# Altium PCB MSXII_Controller_Breakout.PcbDoc
Units mm, origin at the board's own origin, x right, y up, seen from the top; angles counter-clockwise.
Board outline 50 x 50 mm, 2 copper layers (Top Layer, Bottom Layer); 4 components, 32 nets, 556 pads, 21 vias.
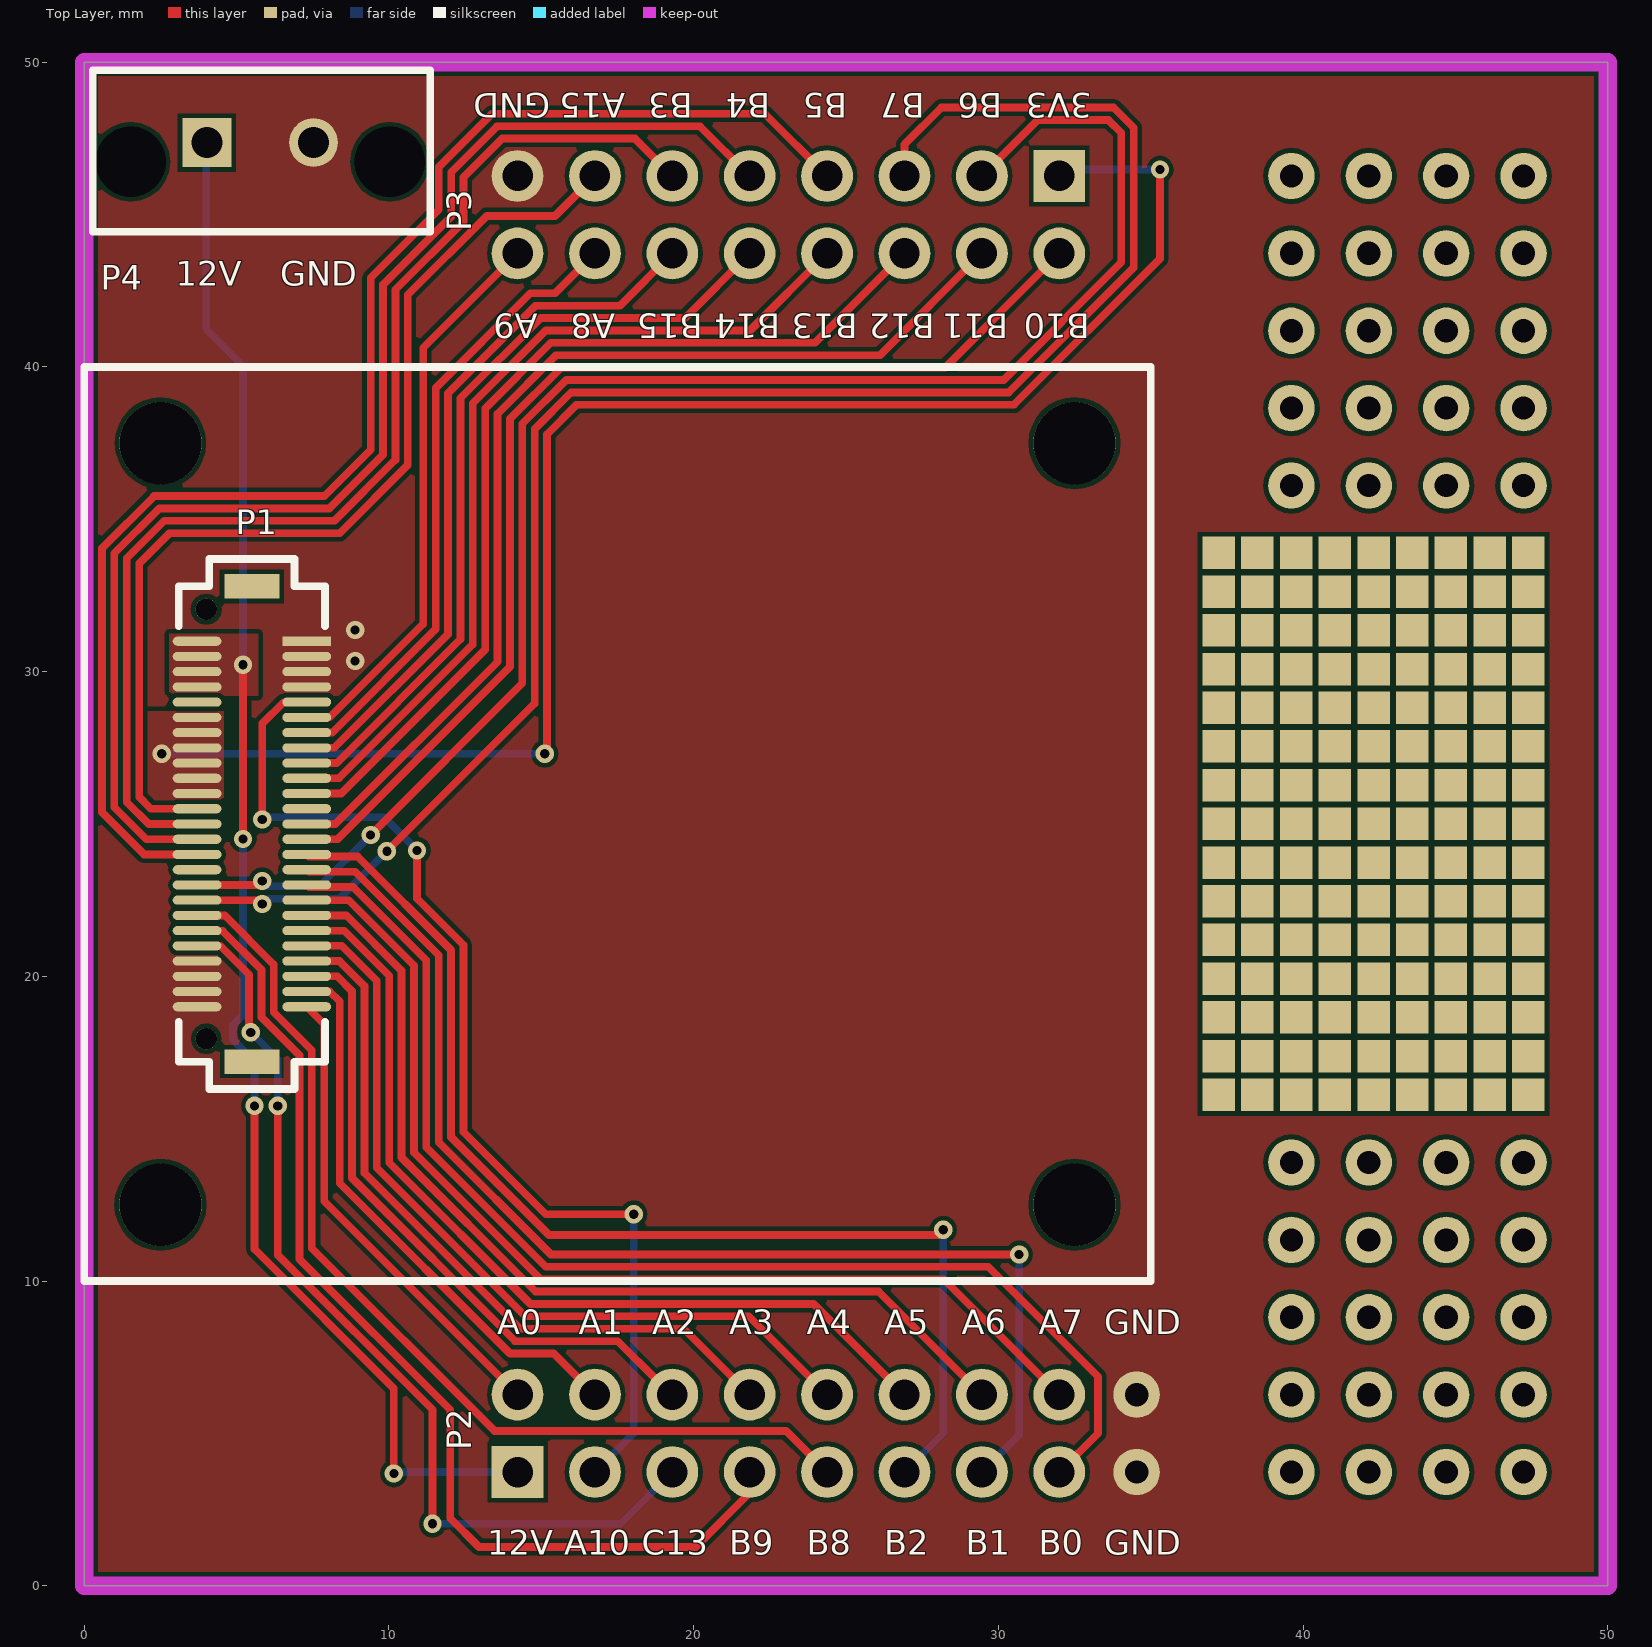
[diagram p0: Top Layer view]
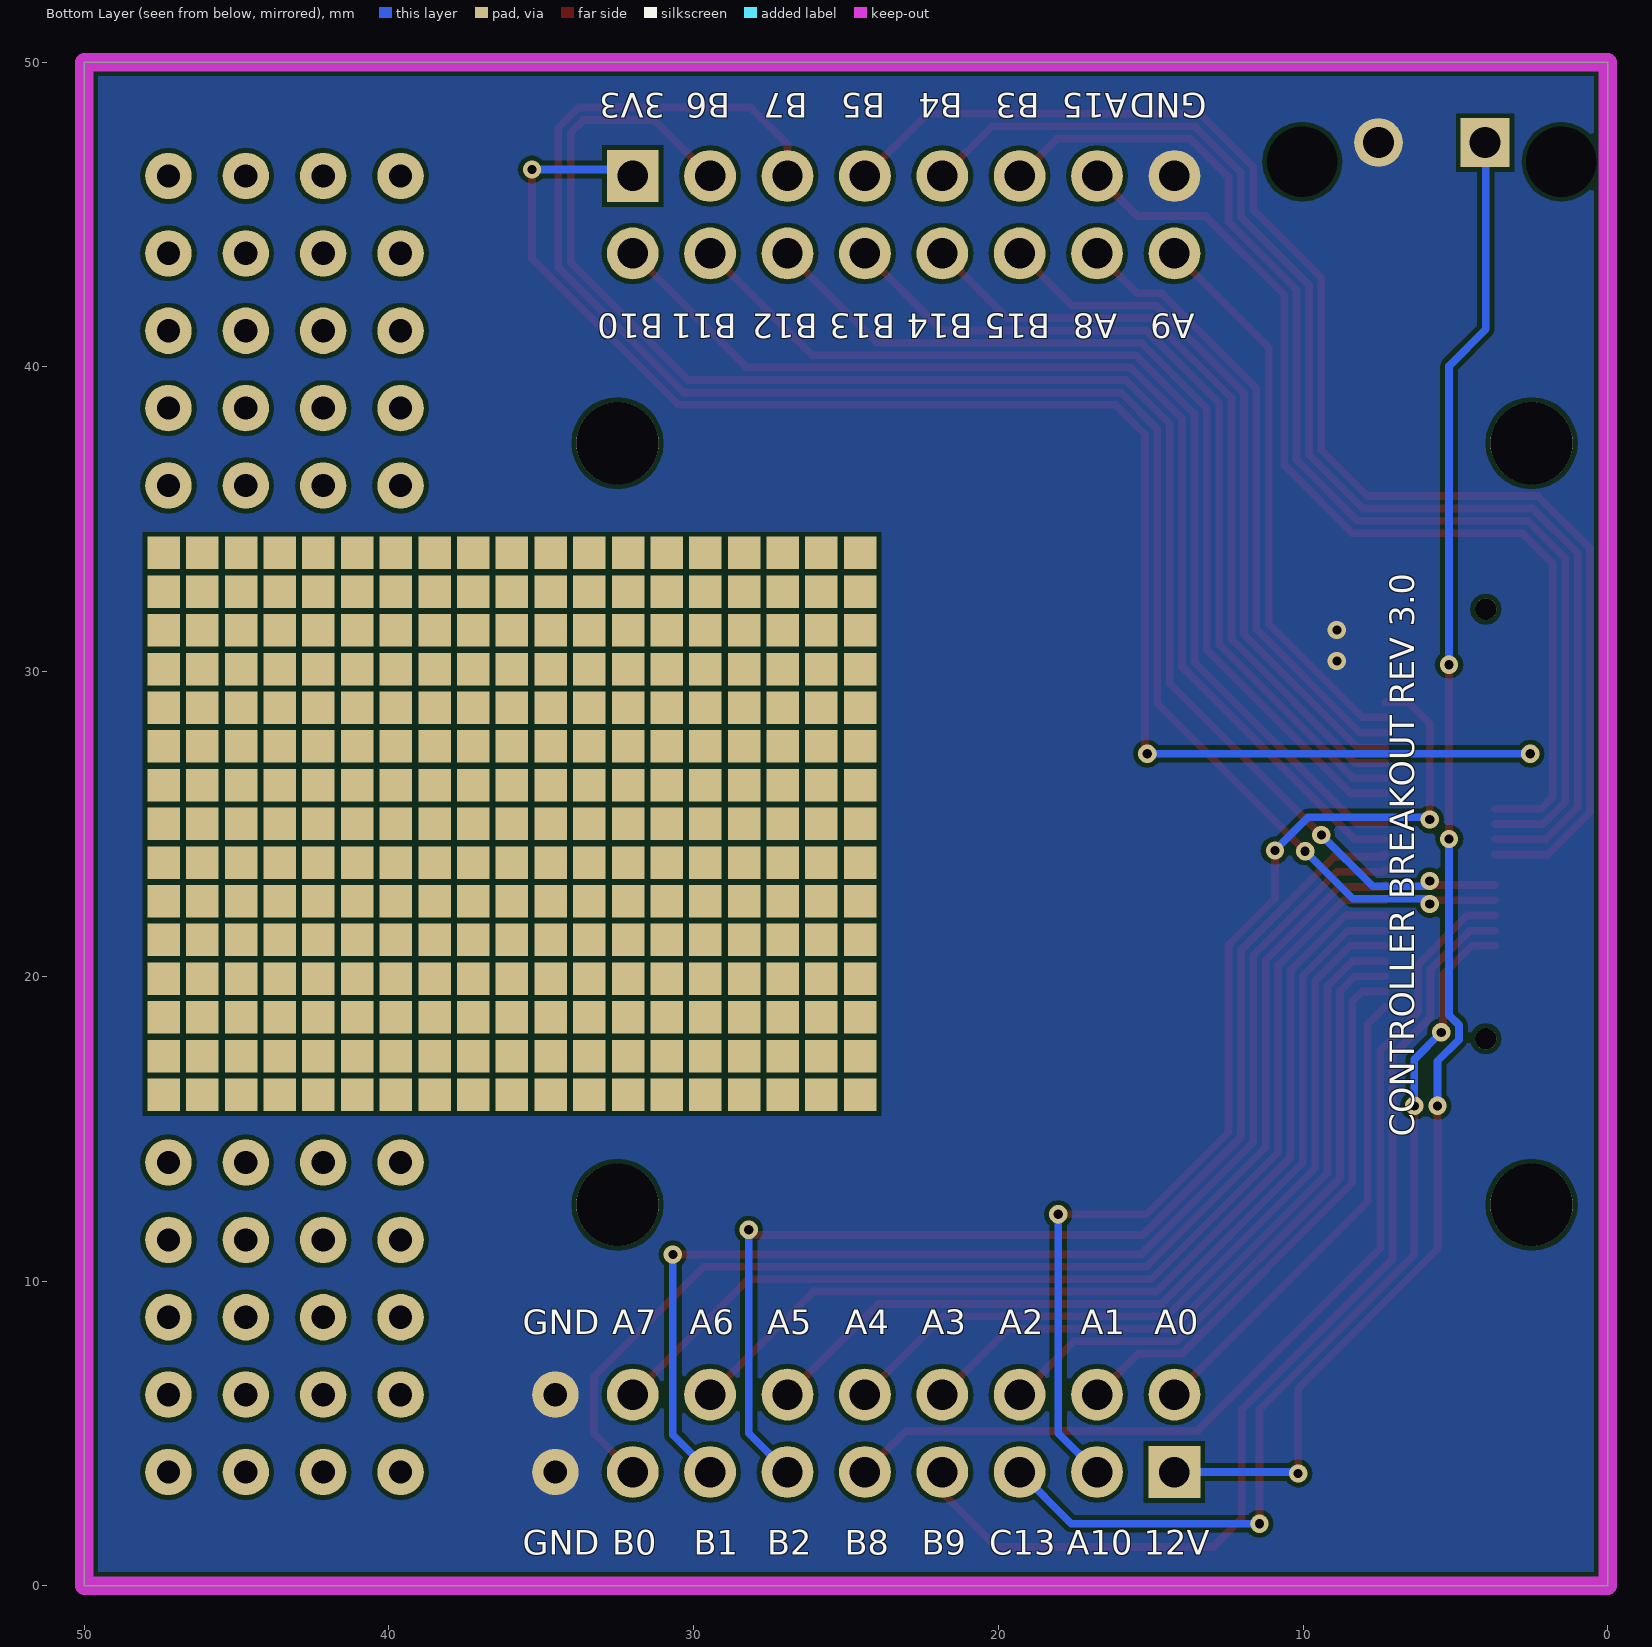
[diagram p1: Bottom Layer view, seen from below]

## Layer stack, top to bottom
Top Solder: solder mask 0.0102, Solder Resist, Dk 3.5
Top Layer: signal copper 0.0356
Dielectric 1: dielectric 0.32, FR-4, Dk 4.8
Bottom Layer: signal copper 0.0356
Bottom Solder: solder mask 0.0102, Solder Resist, Dk 3.5

## Board outline
0,0 0,50 50,50 50,0

## Design rules (kind name [scope] priority, off if disabled: settings)
Clearance [All] p1: gap=0.152
PolygonConnect PolygonConnect_Mezzanine [HasFootprint('CONN, Bergstak 50 Pos Plug')] p1: connectstyle=Direct reliefconductorwidth=0.254 reliefentries=4 polygonreliefangle="90 Angle" airgapwidth=0.254
PolygonConnect PolygonConnect_NotPad [Not(IsPad)] p2: connectstyle=Direct reliefconductorwidth=0.254 reliefentries=4 polygonreliefangle="90 Angle" airgapwidth=0.254
PolygonConnect [All] p3: connectstyle=Relief reliefconductorwidth=0.254 reliefentries=4 polygonreliefangle="90 Angle" airgapwidth=0.254
RoutingVias [All] p1: holewidth=0.3 width=0.6 viastyle="Through Hole" minholewidth=0.3 minwidth=0.6 maxholewidth=0.711 maxwidth=1.27
SolderMaskExpansion [All] p1: expansion=0.102
Width [All] p1: maxlimit=0.254 minlimit=0.254 preferedwidth=0.254
30 further rules are at their usual default settings.

## Classes and differential pairs
component class MSXII_Controller_Breakout: P2 P3 P4
component class Controller_Board_Interface: P1

## Components (designator, comment, footprint, x,y, rotation, side; value= is the part's Value field where it differs from the comment)
P1 "CONN 50POS Bergstak Plug 0.02\"" "CONN, Bergstak 50 Pos Plug" 5.5,25 r0 top locked
P2 "16POS" "CONN, 16POS 0.100\" Header" 14.22,3.73 r0 top
P3 "16POS" "CONN, 16POS 0.100\" Header" 32,46.27 r180 top
P4 "CONN 2POS ULTRA-FIT 0.138\"" "CONN, 2POS ULTRA-FIT" 4.024,47.366 r0 top

## Footprints (in the part's own frame and the unit in brackets; to place one, negate y for a bottom-side part, rotate by r counter-clockwise, add the part's x,y. Pads: shape width x height; smd on the part's side, far side on the other; paste and mask are expansions set on the pad)
"CONN, 2POS ULTRA-FIT" [mm] "2 Positions Header, Shrouded Connector 0.138\" (3.50mm) Through Hole Gold"
  rect 1.6x1.6 hole 1.02: 1(0,0)
  round 1.6 hole 1.02: 2(3.5,0)
  round 1.6 hole 2.3: ""(-2.5,-0.63) ""(6,-0.63)
  silkscreen extent -3.74,-2.93 7.33,2.37, body extent -3.48,-2.87 7.12,5.79, height 13.85
"CONN, 16POS 0.100\" Header" [mm]
  rect 1.7x1.7 hole 1: 1(0,0)
  round 1.7 hole 1: 2(2.54,0) 3(5.08,0) 4(7.62,0) 5(10.16,0) 6(12.7,0) 7(15.24,0) 8(17.78,0) 9(17.78,2.54) 10(15.24,2.54) 11(12.7,2.54) 12(10.16,2.54) 13(7.62,2.54) 14(5.08,2.54) 15(2.54,2.54) 16(0,2.54)
"CONN, Bergstak 50 Pos Plug" [mm] "Bergstak 50 Position Plug"
  rect 1.6x0.3 smd: 1(1.8,6)
  oval 1.6x0.3 smd: 2(1.8,5.5) 3(1.8,5) 4(1.8,4.5) 5(1.8,4) 6(1.8,3.5) 7(1.8,3) 8(1.8,2.5) 9(1.8,2) 10(1.8,1.5) 11(1.8,1) 12(1.8,0.5) 13(1.8,0) 14(1.8,-0.5) 15(1.8,-1) 16(1.8,-1.5) 17(1.8,-2) 18(1.8,-2.5) 19(1.8,-3) 20(1.8,-3.5) 21(1.8,-4) 22(1.8,-4.5) 23(1.8,-5) 24(1.8,-5.5) 25(1.8,-6) 26(-1.8,-6) 27(-1.8,-5.5) 28(-1.8,-5) 29(-1.8,-4.5) 30(-1.8,-4) 31(-1.8,-3.5) 32(-1.8,-3) 33(-1.8,-2.5) 34(-1.8,-2) 35(-1.8,-1.5) 36(-1.8,-1) 37(-1.8,-0.5) 38(-1.8,0) 39(-1.8,0.5) 40(-1.8,1) 41(-1.8,1.5) 42(-1.8,2) 43(-1.8,2.5) 44(-1.8,3) 45(-1.8,3.5) 46(-1.8,4) 47(-1.8,4.5) 48(-1.8,5) 49(-1.8,5.5) 50(-1.8,6)
  round 0.7 hole 0.7: ""(-1.5,-7.05) ""(-1.5,7.05)
  rect 1.8x0.8 smd: ""(0,-7.8) ""(0,7.8)
  silkscreen extent -2.4,-8.7 2.4,8.7

## Part data
P1: "50 Position Connector Plug, Outer Shroud Contacts Surface Mount Gold"
P2 P3: library part "CONN 16POS HEADR MALE 0.1\"", "CONN HEADER .100\" DUAL STR 16POS"
P4: "2 Positions Header, Shrouded Connector 0.138\" (3.50mm) Through Hole Gold"

## Free pads (board coordinates)
  rect 1.067x1.067 smd far side: 0(24.535,16.115) 0(24.535,17.385) 0(24.535,18.655) 0(24.535,19.925) 0(24.535,21.195) 0(24.535,22.465) 0(24.535,23.735) 0(24.535,25.005) 0(24.535,26.275) 0(24.535,27.545) 0(24.535,28.815) 0(24.535,30.085) 0(24.535,31.355) 0(24.535,32.625) 0(24.535,33.895) 0(25.805,16.115) 0(25.805,17.385) 0(25.805,18.655) 0(25.805,19.925) 0(25.805,21.195) 0(25.805,22.465) 0(25.805,23.735) 0(25.805,25.005) 0(25.805,26.275) 0(25.805,27.545) 0(25.805,28.815) 0(25.805,30.085) 0(25.805,31.355) 0(25.805,32.625) 0(25.805,33.895) 0(27.075,16.115) 0(27.075,17.385) 0(27.075,18.655) 0(27.075,19.925) 0(27.075,21.195) 0(27.075,22.465) 0(27.075,23.735) 0(27.075,25.005) 0(27.075,26.275) 0(27.075,27.545) 0(27.075,28.815) 0(27.075,30.085) 0(27.075,31.355) 0(27.075,32.625) 0(27.075,33.895) 0(28.345,16.115) 0(28.345,17.385) 0(28.345,18.655) 0(28.345,19.925) 0(28.345,21.195) 0(28.345,22.465) 0(28.345,23.735) 0(28.345,25.005) 0(28.345,26.275) 0(28.345,27.545) 0(28.345,28.815) 0(28.345,30.085) 0(28.345,31.355) 0(28.345,32.625) 0(28.345,33.895) 0(29.615,16.115) 0(29.615,17.385) 0(29.615,18.655) 0(29.615,19.925) 0(29.615,21.195) 0(29.615,22.465) 0(29.615,23.735) 0(29.615,25.005) 0(29.615,26.275) 0(29.615,27.545) 0(29.615,28.815) 0(29.615,30.085) 0(29.615,31.355) 0(29.615,32.625) 0(29.615,33.895) 0(30.885,16.115) 0(30.885,17.385) 0(30.885,18.655) 0(30.885,19.925) 0(30.885,21.195) 0(30.885,22.465) 0(30.885,23.735) 0(30.885,25.005) 0(30.885,26.275) 0(30.885,27.545) 0(30.885,28.815) 0(30.885,30.085) 0(30.885,31.355) 0(30.885,32.625) 0(30.885,33.895) 0(32.155,16.115) 0(32.155,17.385) 0(32.155,18.655) 0(32.155,19.925) 0(32.155,21.195) 0(32.155,22.465) 0(32.155,23.735) 0(32.155,25.005) 0(32.155,26.275) 0(32.155,27.545) 0(32.155,28.815) 0(32.155,30.085) 0(32.155,31.355) 0(32.155,32.625) 0(32.155,33.895) 0(33.425,16.115) 0(33.425,17.385) 0(33.425,18.655) 0(33.425,19.925) 0(33.425,21.195) 0(33.425,22.465) 0(33.425,23.735) 0(33.425,25.005) 0(33.425,26.275) 0(33.425,27.545) 0(33.425,28.815) 0(33.425,30.085) 0(33.425,31.355) 0(33.425,32.625) 0(33.425,33.895) 0(34.695,16.115) 0(34.695,17.385) 0(34.695,18.655) 0(34.695,19.925) 0(34.695,21.195) 0(34.695,22.465) 0(34.695,23.735) 0(34.695,25.005) 0(34.695,26.275) 0(34.695,27.545) 0(34.695,28.815) 0(34.695,30.085) 0(34.695,31.355) 0(34.695,32.625) 0(34.695,33.895) 0(35.965,16.115) 0(35.965,17.385) 0(35.965,18.655) 0(35.965,19.925) 0(35.965,21.195) 0(35.965,22.465) 0(35.965,23.735) 0(35.965,25.005) 0(35.965,26.275) 0(35.965,27.545) 0(35.965,28.815) 0(35.965,30.085) 0(35.965,31.355) 0(35.965,32.625) 0(35.965,33.895) 0(37.235,16.115) 0(37.235,17.385) 0(37.235,18.655) 0(37.235,19.925) 0(37.235,21.195) 0(37.235,22.465) 0(37.235,23.735) 0(37.235,25.005) 0(37.235,26.275) 0(37.235,27.545) 0(37.235,28.815) 0(37.235,30.085) 0(37.235,31.355) 0(37.235,32.625) 0(37.235,33.895) 0(38.505,16.115) 0(38.505,17.385) 0(38.505,18.655) 0(38.505,19.925) 0(38.505,21.195) 0(38.505,22.465) 0(38.505,23.735) 0(38.505,25.005) 0(38.505,26.275) 0(38.505,27.545) 0(38.505,28.815) 0(38.505,30.085) 0(38.505,31.355) 0(38.505,32.625) 0(38.505,33.895) 0(39.775,16.115) 0(39.775,17.385) 0(39.775,18.655) 0(39.775,19.925) 0(39.775,21.195) 0(39.775,22.465) 0(39.775,23.735) 0(39.775,25.005) 0(39.775,26.275) 0(39.775,27.545) 0(39.775,28.815) 0(39.775,30.085) 0(39.775,31.355) 0(39.775,32.625) 0(39.775,33.895) 0(41.045,16.115) 0(41.045,17.385) 0(41.045,18.655) 0(41.045,19.925) 0(41.045,21.195) 0(41.045,22.465) 0(41.045,23.735) 0(41.045,25.005) 0(41.045,26.275) 0(41.045,27.545) 0(41.045,28.815) 0(41.045,30.085) 0(41.045,31.355) 0(41.045,32.625) 0(41.045,33.895) 0(42.315,16.115) 0(42.315,17.385) 0(42.315,18.655) 0(42.315,19.925) 0(42.315,21.195) 0(42.315,22.465) 0(42.315,23.735) 0(42.315,25.005) 0(42.315,26.275) 0(42.315,27.545) 0(42.315,28.815) 0(42.315,30.085) 0(42.315,31.355) 0(42.315,32.625) 0(42.315,33.895) 0(43.585,16.115) 0(43.585,17.385) 0(43.585,18.655) 0(43.585,19.925) 0(43.585,21.195) 0(43.585,22.465) 0(43.585,23.735) 0(43.585,25.005) 0(43.585,26.275) 0(43.585,27.545) 0(43.585,28.815) 0(43.585,30.085) 0(43.585,31.355) 0(43.585,32.625) 0(43.585,33.895) 0(44.855,16.115) 0(44.855,17.385) 0(44.855,18.655) 0(44.855,19.925) 0(44.855,21.195) 0(44.855,22.465) 0(44.855,23.735) 0(44.855,25.005) 0(44.855,26.275) 0(44.855,27.545) 0(44.855,28.815) 0(44.855,30.085) 0(44.855,31.355) 0(44.855,32.625) 0(44.855,33.895) 0(46.125,16.115) 0(46.125,17.385) 0(46.125,18.655) 0(46.125,19.925) 0(46.125,21.195) 0(46.125,22.465) 0(46.125,23.735) 0(46.125,25.005) 0(46.125,26.275) 0(46.125,27.545) 0(46.125,28.815) 0(46.125,30.085) 0(46.125,31.355) 0(46.125,32.625) 0(46.125,33.895) 0(47.395,16.115) 0(47.395,17.385) 0(47.395,18.655) 0(47.395,19.925) 0(47.395,21.195) 0(47.395,22.465) 0(47.395,23.735) 0(47.395,25.005) 0(47.395,26.275) 0(47.395,27.545) 0(47.395,28.815) 0(47.395,30.085) 0(47.395,31.355) 0(47.395,32.625) 0(47.395,33.895)
  round 1.524 hole 0.762: 0(34.54,3.73) 0(39.62,3.73) 0(39.62,6.27) 0(39.62,8.81) 0(39.62,11.35) 0(39.62,13.89) 0(39.62,36.11) 0(39.62,38.65) 0(39.62,41.19) 0(39.62,43.73) 0(39.62,46.27) 0(42.16,3.73) 0(42.16,6.27) 0(42.16,8.81) 0(42.16,11.35) 0(42.16,13.89) 0(42.16,36.11) 0(42.16,38.65) 0(42.16,41.19) 0(42.16,43.73) 0(42.16,46.27) 0(44.7,3.73) 0(44.7,6.27) 0(44.7,8.81) 0(44.7,11.35) 0(44.7,13.89) 0(44.7,36.11) 0(44.7,38.65) 0(44.7,41.19) 0(44.7,43.73) 0(44.7,46.27) 0(47.24,3.73) 0(47.24,6.27) 0(47.24,8.81) 0(47.24,11.35) 0(47.24,13.89) 0(47.24,36.11) 0(47.24,38.65) 0(47.24,41.19) 0(47.24,43.73) 0(47.24,46.27) 1(34.54,6.27)
  rect 1.067x1.067 smd: 0(37.235,16.115) 0(37.235,17.385) 0(37.235,18.655) 0(37.235,19.925) 0(37.235,21.195) 0(37.235,22.465) 0(37.235,23.735) 0(37.235,25.005) 0(37.235,26.275) 0(37.235,27.545) 0(37.235,28.815) 0(37.235,30.085) 0(37.235,31.355) 0(37.235,32.625) 0(37.235,33.895) 0(38.505,16.115) 0(38.505,17.385) 0(38.505,18.655) 0(38.505,19.925) 0(38.505,21.195) 0(38.505,22.465) 0(38.505,23.735) 0(38.505,25.005) 0(38.505,26.275) 0(38.505,27.545) 0(38.505,28.815) 0(38.505,30.085) 0(38.505,31.355) 0(38.505,32.625) 0(38.505,33.895) 0(39.775,16.115) 0(39.775,17.385) 0(39.775,18.655) 0(39.775,19.925) 0(39.775,21.195) 0(39.775,22.465) 0(39.775,23.735) 0(39.775,25.005) 0(39.775,26.275) 0(39.775,27.545) 0(39.775,28.815) 0(39.775,30.085) 0(39.775,31.355) 0(39.775,32.625) 0(39.775,33.895) 0(41.045,16.115) 0(41.045,17.385) 0(41.045,18.655) 0(41.045,19.925) 0(41.045,21.195) 0(41.045,22.465) 0(41.045,23.735) 0(41.045,25.005) 0(41.045,26.275) 0(41.045,27.545) 0(41.045,28.815) 0(41.045,30.085) 0(41.045,31.355) 0(41.045,32.625) 0(41.045,33.895) 0(42.315,16.115) 0(42.315,17.385) 0(42.315,18.655) 0(42.315,19.925) 0(42.315,21.195) 0(42.315,22.465) 0(42.315,23.735) 0(42.315,25.005) 0(42.315,26.275) 0(42.315,27.545) 0(42.315,28.815) 0(42.315,30.085) 0(42.315,31.355) 0(42.315,32.625) 0(42.315,33.895) 0(43.585,16.115) 0(43.585,17.385) 0(43.585,18.655) 0(43.585,19.925) 0(43.585,21.195) 0(43.585,22.465) 0(43.585,23.735) 0(43.585,25.005) 0(43.585,26.275) 0(43.585,27.545) 0(43.585,28.815) 0(43.585,30.085) 0(43.585,31.355) 0(43.585,32.625) 0(43.585,33.895) 0(44.855,16.115) 0(44.855,17.385) 0(44.855,18.655) 0(44.855,19.925) 0(44.855,21.195) 0(44.855,22.465) 0(44.855,23.735) 0(44.855,25.005) 0(44.855,26.275) 0(44.855,27.545) 0(44.855,28.815) 0(44.855,30.085) 0(44.855,31.355) 0(44.855,32.625) 0(44.855,33.895) 0(46.125,16.115) 0(46.125,17.385) 0(46.125,18.655) 0(46.125,19.925) 0(46.125,21.195) 0(46.125,22.465) 0(46.125,23.735) 0(46.125,25.005) 0(46.125,26.275) 0(46.125,27.545) 0(46.125,28.815) 0(46.125,30.085) 0(46.125,31.355) 0(46.125,32.625) 0(46.125,33.895) 0(47.395,16.115) 0(47.395,17.385) 0(47.395,18.655) 0(47.395,19.925) 0(47.395,21.195) 0(47.395,22.465) 0(47.395,23.735) 0(47.395,25.005) 0(47.395,26.275) 0(47.395,27.545) 0(47.395,28.815) 0(47.395,30.085) 0(47.395,31.355) 0(47.395,32.625) 0(47.395,33.895)
  round 2.7 hole 2.7: ""(2.5,12.5) ""(2.5,37.5) ""(32.5,12.5) ""(32.5,37.5)

## Via types
v1: diameter 0.6, hole 0.3, Top Layer to Bottom Layer, tented both sides, 21 vias

## Nets (pads, with @x,y where several pads share a name; then routed paths per layer and width w, separated by ;. In a path a pad name is that pad's centre, name@x,y a point inside that pad or via, vN(x,y) a via of type N, cw(c..) or ccw(c..) an arc to the next point about the centre after c; other vN are vias at no path point)
3V3: P1.40 P1.41 P1.42 P1.43 P1.44 P1.45 P3.1 | length 52
  Top Layer w0.254: v1(15.113,27.305) 15.189,27.381 15.189,37.795 16.154,38.76 30.512,38.76 35.306,43.555 v1(35.306,46.482)
  Bottom Layer w0.254: v1(2.54,27.305) v1(15.113,27.305) ; P3.1 32,46.232 32.25,46.482 v1(35.306,46.482)
+12V: P1.47 P1.48 P1.49 P1.50 P2.1 P4.1 | length 50.7
  Top Layer w0.254: v1(5.207,24.511) v1(5.207,30.226) ; v1(5.588,15.748) 5.588,11.043 10.16,6.471 v1(10.16,3.683)
  Bottom Layer w0.254: P4.1@4,47.5 4,41.236 5.207,40.029 v1(5.207,30.226) ; v1(5.207,24.511) 5.207,18.726 4.882,18.401 4.882,17.921 5.588,17.215 v1(5.588,15.748) ; v1(10.16,3.683) 10.207,3.73 P2.1
GND: P1.1 P1.2 P1.3 P1.4 P1.26 P1.27 P1.28 P1.29 P3.8 P4.2 pad.0@34.54,3.73 pad.1
  other v1: 8.89,30.353 8.89,31.369
PA0: P1.25 P2.16 | length 15.6
  Top Layer w0.254: P1.25 7.874,18.426 7.874,12.616 P2.16
PA1: P1.24 P2.15 | length 18.4
  Top Layer w0.254: P1.24 8.057,19.5 8.379,19.178 8.379,13.211 13.97,7.62 15.41,7.62 P2.15
PA2/USART2_TX: P1.23 P2.14 | length 21.5
  Top Layer w0.254: P1.23 8.302,20 8.786,19.516 8.786,13.379 14.138,8.026 17.507,8.026 18.796,6.738 18.796,6.299 18.825,6.27 P2.14
PA3/USART2_RX: P1.22 P2.13 | length 24
  Top Layer w0.254: P1.22 8.376,20.5 9.192,19.684 9.192,13.547 14.307,8.433 19.677,8.433 P2.13
PA4/SPI1_NSS: P1.21 P2.12 | length 26.8
  Top Layer w0.254: P1.21 8.451,21 9.599,19.853 9.599,13.716 14.475,8.839 21.811,8.839 P2.12
PA5/SPI1_SCK: P1.20 P2.11 | length 29.5
  Top Layer w0.254: P1.20 8.526,21.5 10.005,20.021 10.005,13.884 14.643,9.246 23.944,9.246 P2.11
PA6/SPI1_MISO: P1.19 P2.10 | length 32.3
  Top Layer w0.254: P1.19 8.601,22 10.411,20.189 10.411,14.052 14.812,9.652 26.078,9.652 P2.10
PA7/SPI1_MOSI: P1.18 P2.9 | length 35
  Top Layer w0.254: P1.18 8.675,22.5 10.818,20.358 10.818,14.221 14.98,10.058 28.212,10.058 P2.9
PA8: P1.7 P3.10 | length 20.6
  Top Layer w0.254: P1.7 8.132,28 11.532,31.4 11.532,39.31 14.639,42.418 15.448,42.418 P3.10
PA9: P1.6 P3.9 | length 18.5
  Top Layer w0.254: P1.6 8.057,28.5 11.125,31.568 11.125,40.635 P3.9
PA10: P1.5 P2.2 | length 36
  Top Layer w0.254: v1(5.842,25.146) 5.842,28.299 6.543,29 P1.5 ; v1(10.922,24.13) 10.922,22.552 12.443,21.031 12.443,14.894 15.145,12.192 v1(18.034,12.192)
  Bottom Layer w0.254: v1(5.842,25.146) 5.913,25.217 9.835,25.217 v1(10.922,24.13) ; P2.2 18.034,5.004 v1(18.034,12.192)
PA15: P1.39 P3.7 | length 33.2
  Top Layer w0.254: P1.39 2.186,25.5 1.799,25.887 1.799,33.549 2.794,34.544 8.379,34.544 10.617,36.782 10.617,42.367 13.208,44.958 15.448,44.958 P3.7
PB0: P1.17 P2.8 | length 39.9
  Top Layer w0.254: P1.17 7.371,22.929 8.821,22.929 11.224,20.526 11.224,14.389 15.148,10.465 29.667,10.465 33.274,6.858 33.274,5.004 P2.8
PB1: P1.16 P2.7 | length 39.9
  Top Layer w0.254: P1.16 7.371,23.429 8.895,23.429 11.631,20.694 11.631,14.557 15.317,10.871 v1(30.683,10.871)
  Bottom Layer w0.254: P2.7 30.683,4.953 v1(30.683,10.871)
PB2: P1.15 P2.6 | length 38.2
  Top Layer w0.254: P1.15 7.371,23.929 8.97,23.929 12.037,20.863 12.037,14.726 15.252,11.511 28.021,11.511 v1(28.194,11.684)
  Bottom Layer w0.254: P2.6 28.194,5.004 v1(28.194,11.684)
PB3: P1.38 P3.6 | length 38.9
  Top Layer w0.254: P1.38 2.111,25 1.392,25.719 1.392,33.717 2.626,34.95 8.211,34.95 10.211,36.951 10.211,42.536 12.446,44.771 12.446,46.228 13.716,47.498 18.072,47.498 P3.6
PB4: P1.37 P3.5 | length 42.9
  Top Layer w0.254: P1.37 2.037,24.5 0.986,25.551 0.986,33.885 2.457,35.357 8.042,35.357 9.804,37.119 9.804,42.704 12.04,44.939 12.04,46.396 13.548,47.904 20.206,47.904 P3.5
PB5: P1.36 P3.4 | length 47
  Top Layer w0.254: P1.36 1.962,24 0.579,25.382 0.579,34.054 2.289,35.763 7.874,35.763 9.398,37.287 9.398,42.926 11.633,45.161 11.633,46.565 13.379,48.311 22.339,48.311 P3.4
PB6/USART1_TX: P1.34 P3.2 | length 53.7
  Top Layer w0.254: P1.34 5.716,23 v1(5.842,23.126) ; v1(9.398,24.638) 14.376,29.616 14.376,38.132 15.818,39.573 30.175,39.573 34.036,43.434 34.036,47.685 33.614,48.108 31.298,48.108 P3.2
  Bottom Layer w0.254: v1(5.842,23.126) 6.015,22.953 7.713,22.953 v1(9.398,24.638)
PB7/USART1_RX: P1.33 P3.3 | length 58.6
  Top Layer w0.254: P1.33 5.716,22.5 v1(5.842,22.374) ; v1(9.93,24.106) 14.783,28.959 14.783,37.964 15.986,39.167 30.344,39.167 34.442,43.266 34.442,47.854 33.782,48.514 28.127,48.514 26.92,47.307 P3.3
  Bottom Layer w0.254: v1(5.842,22.374) 6.015,22.547 8.371,22.547 v1(9.93,24.106)
PB8/I2C1_SCL: P1.32 P2.5 | length 33
  Top Layer w0.254: P1.32 4.607,22 6.221,20.386 6.221,18.822 7.468,17.575 7.468,11.074 13.462,5.08 23.03,5.08 P2.5
PB9/I2C1_SDA: P1.31 P2.4 | length 34.9
  Top Layer w0.254: P1.31 4.532,21.5 5.814,20.218 5.814,18.654 7.061,17.407 7.061,10.719 12.009,5.771 12.009,2.215 12.954,1.27 20.066,1.27 21.84,3.044 P2.4
PB10/USART3_TX/I2C2_SCL: P1.14 P3.16 | length 37.4
  Top Layer w0.254: P1.14 8.311,24.5 13.97,30.159 13.97,38.3 15.649,39.98 28.25,39.98 P3.16
PB11/USART3_RX/I2C2_SDA: P1.13 P3.15 | length 34.7
  Top Layer w0.254: P1.13 8.236,25 13.564,30.328 13.564,38.469 15.481,40.386 26.116,40.386 P3.15
PB12/SPI2_NSS: P1.11 P3.14 | length 31.6
  Top Layer w0.254: P1.11 8.431,26 13.157,30.726 13.157,38.637 15.313,40.792 23.982,40.792 P3.14
PB13/SPI2_SCK: P1.10 P3.13 | length 28.9
  Top Layer w0.254: P1.10 8.356,26.5 12.751,30.895 12.751,38.805 15.144,41.199 21.849,41.199 P3.13
PB14/SPI2_MISO: P1.9 P3.12 | length 26.1
  Top Layer w0.254: P1.9 8.281,27 12.344,31.063 12.344,38.974 14.976,41.605 19.715,41.605 P3.12
PB15/SPI2_MOSI: P1.8 P3.11 | length 23.4
  Top Layer w0.254: P1.8 8.207,27.5 11.938,31.231 11.938,39.142 14.808,42.012 17.582,42.012 P3.11
PC13: P1.30 P2.3 | length 31.2
  Top Layer w0.254: P1.30 4.457,21 5.408,20.049 5.408,18.214 v1(5.461,18.161) ; v1(6.35,15.748) 6.35,10.855 11.43,5.775 v1(11.43,2.032)
  Bottom Layer w0.254: v1(5.461,18.161) 6.35,17.272 v1(6.35,15.748) ; v1(11.43,2.032) 17.602,2.032 P2.3
pads on no net: P1. P1.12 P1.35 P1.46 P4.

## Polygon pours and split planes (outlines as drawn)
3V3 on Top Layer "3V3_L01_P002" (solid, pour order 2): 4.572,25.781 1.651,25.781 1.651,28.702 4.572,28.702
+12V on Top Layer "+12V_L01_P004" (solid, pour order 4): 2.794,31.242 2.794,29.21 5.715,29.21 5.715,31.242
GND on Top Layer "GND_L01_P010" (solid, pour order 10): 0,0 50,0 50,50 0,50
GND on Bottom Layer "GND_L02_P008" (solid, pour order 8): 0,50 50,50 50,0 0,0

## Keep-outs
Keep-Out Layer:
  lines w0.6: 0,50 0,0 50,0 ; 0,50 0,50 ; 0,50 50,50 50,0 ; 50,0 50,0

## Silkscreen, mask and mechanical layers (free items; w line width, h text height)
Top Overlay:
  lines w0.254: 0,10 35,10 35,40 0,40 0,10
  text "GND" at 15.286,48.984 h0.8 r180
  text "A15" at 17.76,48.984 h0.8 r180
  text "B3" at 19.966,48.984 h0.8 r180
  text "B4" at 22.506,48.984 h0.8 r180
  text "B5" at 25.046,48.984 h0.8 r180
  text "B7" at 27.586,48.984 h0.8 r180
  text "B6" at 30.126,48.984 h0.8 r180
  text "3V3" at 33.066,48.984 h0.8 r180
  text "12V" at 3,42.672 h0.8
  text "GND" at 6.434,42.672 h0.8
  text "A9" at 14.886,41.745 h0.8 r180
  text "A8" at 17.426,41.745 h0.8 r180
  text "B15" at 20.3,41.745 h0.8 r180
  text "B14" at 22.84,41.745 h0.8 r180
  text "B13" at 25.38,41.745 h0.8 r180
  text "B12" at 27.92,41.745 h0.8 r180
  text "B11" at 30.326,41.745 h0.8 r180
  text "B10" at 33,41.745 h0.8 r180
  text "A0" at 13.554,8.255 h0.8
  text "A1" at 16.227,8.255 h0.8
  text "A2" at 18.634,8.255 h0.8
  text "A3" at 21.174,8.255 h0.8
  text "A4" at 23.714,8.255 h0.8
  text "A5" at 26.254,8.255 h0.8
  text "A6" at 28.794,8.255 h0.8
  text "A7" at 31.334,8.255 h0.8
  text "GND" at 33.474,8.255 h0.8
  text "12V" at 13.22,1.016 h0.8
  text "A10" at 15.76,1.016 h0.8
  text "C13" at 18.3,1.016 h0.8
  text "B9" at 21.174,1.016 h0.8
  text "B8" at 23.714,1.016 h0.8
  text "B2" at 26.254,1.016 h0.8
  text "B1" at 28.927,1.016 h0.8
  text "B0" at 31.334,1.016 h0.8
  text "GND" at 33.474,1.016 h0.8
Bottom Overlay:
  text "GND" at 13.154,48.984 h0.8 r180
  text "A15" at 15.76,48.984 h0.8 r180
  text "B3" at 18.634,48.984 h0.8 r180
  text "B4" at 21.174,48.984 h0.8 r180
  text "B5" at 23.714,48.984 h0.8 r180
  text "B7" at 26.254,48.984 h0.8 r180
  text "B6" at 28.794,48.984 h0.8 r180
  text "3V3" at 30.934,48.984 h0.8 r180
  text "A9" at 13.554,41.745 h0.8 r180
  text "A8" at 16.094,41.745 h0.8 r180
  text "B15" at 18.3,41.745 h0.8 r180
  text "B14" at 20.84,41.745 h0.8 r180
  text "B13" at 23.38,41.745 h0.8 r180
  text "B12" at 25.92,41.745 h0.8 r180
  text "B11" at 28.594,41.745 h0.8 r180
  text "B10" at 31,41.745 h0.8 r180
  text "CONTROLLER BREAKOUT REV 3.0" at 6.35,14.732 h0.8 r270
  text "A0" at 14.886,8.255 h0.8
  text "A1" at 17.293,8.255 h0.8
  text "A2" at 19.966,8.255 h0.8
  text "A3" at 22.506,8.255 h0.8
  text "A4" at 25.046,8.255 h0.8
  text "A5" at 27.586,8.255 h0.8
  text "A6" at 30.126,8.255 h0.8
  text "A7" at 32.666,8.255 h0.8
  text "GND" at 35.606,8.255 h0.8
  text "12V" at 15.22,1.016 h0.8
  text "A10" at 17.76,1.016 h0.8
  text "C13" at 20.3,1.016 h0.8
  text "B9" at 22.506,1.016 h0.8
  text "B8" at 25.046,1.016 h0.8
  text "B2" at 27.586,1.016 h0.8
  text "B1" at 29.993,1.016 h0.8
  text "B0" at 32.666,1.016 h0.8
  text "GND" at 35.606,1.016 h0.8